# EAGLE board MAPLE-CUN-V016-routed (EAGLE 7.3.0)
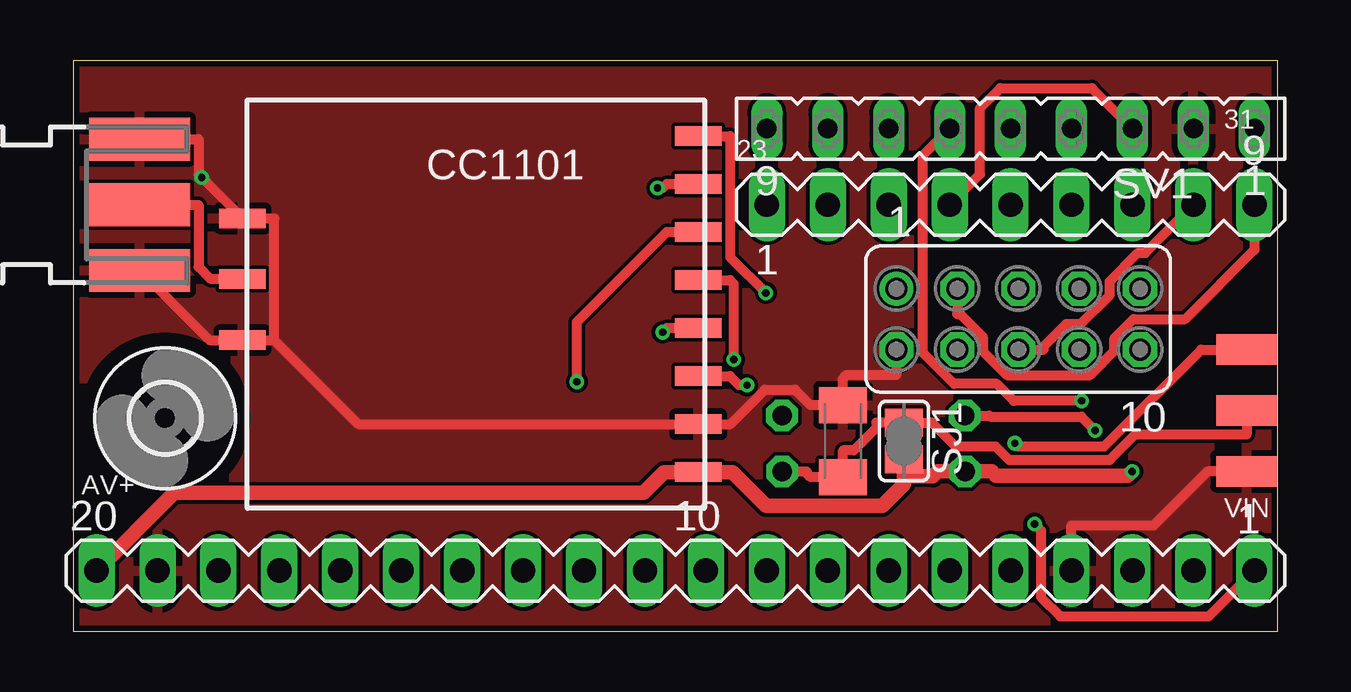
[diagram p0: board, top side]
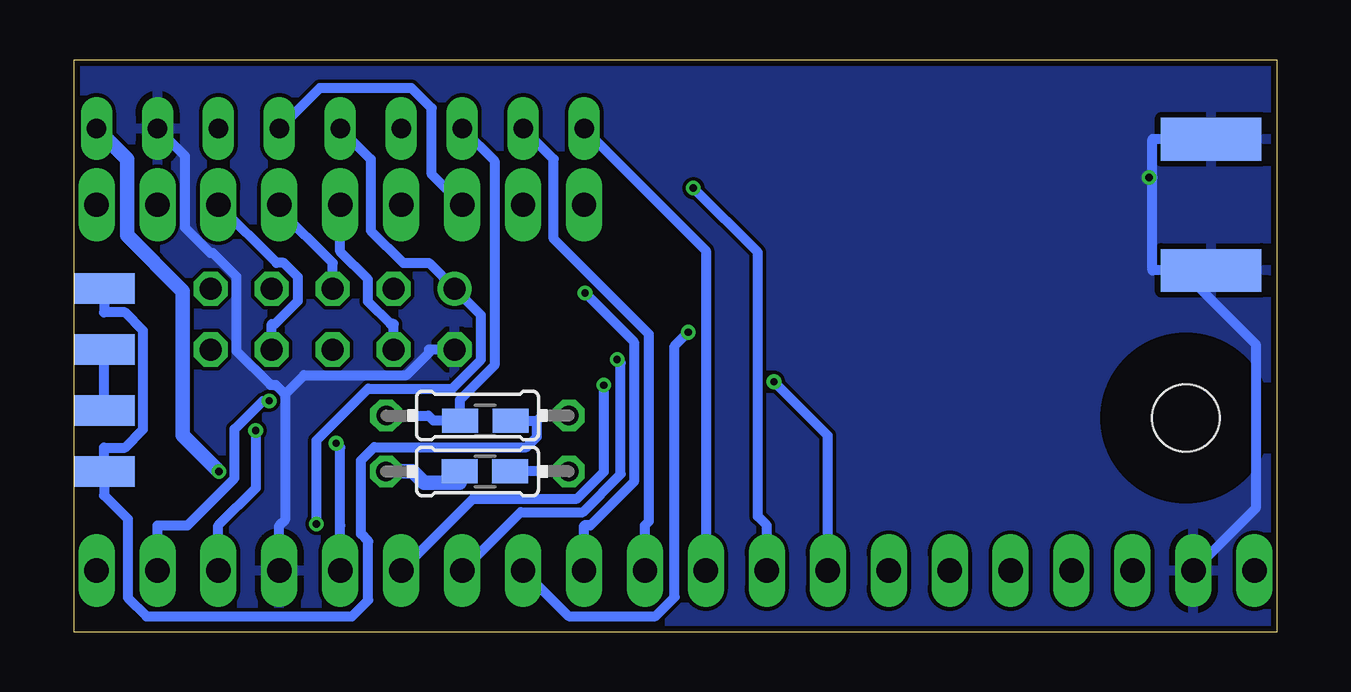
[diagram p1: board, bottom side, seen from below]

Size 50.16 x 23.81 mm. Coordinates in mm from the lower left corner, seen from the top.
Outline: 0,0 0,23.81 50.16,23.81 50.16,0 0,0
Copper layers (1*16): Top 0.035mm / dielectric 1.5mm / Bottom 0.035mm
Design rules "Fusion_eagle_rule_v1.1": minimum track width 6mil, minimum drill 12mil, track to track 6mil, track to pad 6mil, pad to pad 6mil, via to via 6mil, smd to smd 0mil, copper to edge 10mil, drill to drill 10mil, minimum pad ring 10mil, minimum via ring 6mil, stop-mask expansion 2mil, vias tented up to drill 100mil, thermal gap 10mil
Net classes: 0 default: width 0.406 mm; 1 PWR: width 0.61 mm

## Footprints (pad centres in the part's own frame; a part is rotated, then mirrored left to right if it is on the bottom)
C1206K = smd 1.5 x 2: 1 -1.5,0; 2 1.5,0
CC1101_MODULE1_SMD = smd 1.93 x 0.813: ANT 19,5.96; CSN 0,0; GDO0 0,2; GDO2 0,4; GND@0 0,12; GND@1 19,8.5; GND@2 19,3.42; MISO 0,6; MOSI 0,10; SCLK 0,8; VCC 0,14
SMD1,27-2,54 = smd 1.27 x 2.54: 1 0,0
2,8 = hole 2.8: 0,0
0204/7 = drill 0.813 octagon: 1 -3.81,0; 2 3.81,0
R0805W = smd 1.5 x 1: 1 -1.052,0; 2 1.052,0
SJ = smd 1.168 x 1.6: 1 -0.762,0; 2 0.762,0
FE09 = drill 0.813 long: 1 -10.16,0; 2 -7.62,0; 3 -5.08,0; 4 -2.54,0; 5 0,0; 6 2.54,0; 7 5.08,0; 8 7.62,0; 9 10.16,0
MA20-1 = drill 1.016 long: 1 -24.13,0; 2 -21.59,0; 3 -19.05,0; 4 -16.51,0; 5 -13.97,0; 6 -11.43,0; 7 -8.89,0; 8 -6.35,0; 9 -3.81,0; 10 -1.27,0; 11 1.27,0; 12 3.81,0; 13 6.35,0; 14 8.89,0; 15 11.43,0; 16 13.97,0; 17 16.51,0; 18 19.05,0; 19 21.59,0; 20 24.13,0
MA09-1 = drill 1.016 long: 1 -10.16,0; 2 -7.62,0; 3 -5.08,0; 4 -2.54,0; 5 0,0; 6 2.54,0; 7 5.08,0; 8 7.62,0; 9 10.16,0
FE05-2 = drill 0.914: 1 -5.08,1.27 | drill 0.914 octagon: 2 -5.08,-1.27; 3 -2.54,1.27; 4 -2.54,-1.27; 5 0,1.27; 6 0,-1.27; 7 2.54,1.27; 8 2.54,-1.27; 9 5.08,1.27; 10 5.08,-1.27
SMA = smd 4.191 x 1.778: 1 2.115,0; GND@1 2.115,2.733; GND@2 2.115,-2.733 | smd 4.191 x 1.778 bottom: GND@3 2.115,2.733; GND@4 2.115,-2.733

## Placement (x,y rotation side)
C2  4,7uF  [C1206K]  32.07,7.94 90 top
CC1101  CC1101_MODULE1SMD  [CC1101_MODULE1_SMD]  26.04,20.64 180 top
GND  [SMD1,27-2,54]  48.9,6.67 90 top
H1  MOUNT-HOLE2.8  [2,8]  3.81,8.89 0 top
IR+  [SMD1,27-2,54]  48.9,9.21 90 top
IR-IN  [SMD1,27-2,54]  48.9,11.75 90 top
PC+  [SMD1,27-2,54]  48.9,14.29 90 bottom
PC-  [SMD1,27-2,54]  48.9,11.75 90 bottom
PWR+  [SMD1,27-2,54]  48.9,6.67 90 bottom
PWR-  [SMD1,27-2,54]  48.9,9.21 90 bottom
R2  100  [0204/7]  33.34,6.67 180 bottom
R3  100  [R0805W]  33.02,6.67 180 bottom
R5  220  [0204/7]  33.33,9 0 bottom
R7  220  [R0805W]  33.01,8.79 0 bottom
SJ1  [SJ]  34.61,7.94 270 top
SV1  [FE09]  39.05,20.95 180 top
SV4  [MA20-1]  25.08,2.54 180 top
SV5  [MA09-1]  39.05,17.78 0 top
W5100  [FE05-2]  39.37,13.02 0 top
X1  SMA  [SMA]  0.64,17.78 0 top

## Library data of the parts
C2 R2 R3 R5 R7 = rcl
CC1101 = wireless
GND IR+ IR-IN PC+ PC- PWR+ PWR- = wirepad
H1 = holes
SJ1 = jumper
SV1 W5100 = con-lsta; OC_FARNELL: unknown; OC_NEWARK: unknown
SV4 SV5 = con-lstb; OC_FARNELL: unknown; OC_NEWARK: unknown
X1 = sma

## Nets
0-PB11: SV1.6 SV4.2
1-PB10: R5.1 R7.1 SV1.7 SV4.3
3-PB0: IR-IN.1 SV4.5
12: SV4.15
13: SV4.16
14: SV4.17
+5V: SV1.5 SV4.1 W5100.1
CC_IN_0: CC1101.GDO2 SV4.13
CC_OUT_0: CC1101.GDO0 SV4.12
CSN: CC1101.CSN SV4.9
GND: C2.2 CC1101.GND@0 CC1101.GND@1 CC1101.GND@2 GND.1 SV1.2 SV4.4 SV4.19 W5100.2 X1.GND@1 X1.GND@2 X1.GND@3 X1.GND@4
IR+: C2.1 IR+.1 R2.1 R3.1 SJ1.1
MISO2: SV5.7 W5100.8
MOSI: CC1101.MOSI SV4.6
MOSI2: SV5.6 W5100.5
N$1: CC1101.ANT X1.1
N$3: CC1101.MISO SV4.7
N$4: CC1101.SCLK SV4.8
PWR+: PC+.1 PWR+.1 R5.2 R7.2
PWR-: PC-.1 PWR-.1
RX1: SV1.4 SV5.3
S2RX: SV1.8 SV4.10
S2TX: SV1.9 SV4.11
SCK2: SV5.8 W5100.6
TX1: SV1.3 SV5.4
USB-DM: SV5.1
USB-DP: SV5.2
VCC [PWR]: CC1101.VCC R2.2 R3.2 SJ1.2 SV1.1 SV4.20
WIZ_CS: SV5.9 W5100.3
WIZ_RST: SV5.5 W5100.4

## Tracks (layer width: path | path; a pad name or v marks a point on that pad's centre or on a via)
0-PB11  (via drill 0.3 pad 0.61)
  Top 0.406: v42.02,9.61 39.18,9.61 38.47,10.32 36.69,10.32 35.4,11.62 35.4,19.84 SV1.6
  Bottom 0.406: SV4.2 46.67,4.42 45.42,4.42 43.45,6.39 43.45,8.43 42.28,9.61 v42.02,9.61
1-PB10  (via drill 0.3 pad 0.61)
  Top 0.406: v42.58,8.37 42,8.95 38.21,8.95 38.16,9 R5.1
  Bottom 0.406: v42.58,8.37 42.58,5.97 44.13,4.42 SV4.3 | SV1.7 32.63,19.61 32.63,11.09 34.07,9.65 R7.1 35.17,8.79 35.38,9 R5.1
3-PB0  (via drill 0.3 pad 0.61)
  Top 0.406: v39.23,7.85 39.36,7.71 42.96,7.71 46.99,11.75 IR-IN.1
  Bottom 0.406: v39.23,7.85 39.05,7.67 39.05,4.42 SV4.5
+5V  (via drill 0.3 pad 0.61)
  Top 0.406: v40.05,4.48 40.32,4.21 40.32,1.44 41.13,0.63 47.31,0.63 SV4.1
  Bottom 0.406: v40.05,4.48 40.05,7.96 37.89,10.12 34.4,10.12 33.19,11.33 33.19,13.18 W5100.1 35.36,15.35 36.43,15.35 37.78,16.71 37.78,19.68 SV1.5
CC_IN_0  (via drill 0.3 pad 0.61)
  Top 0.406: CC1101.GDO2 24.71,16.64 20.98,12.9 v20.98,10.41
  Bottom 0.406: SV4.13 18.73,8.16 v20.98,10.41
CC_OUT_0  (via drill 0.3 pad 0.61)
  Top 0.406: CC1101.GDO0 24.71,18.64 24.55,18.48 v24.34,18.48
  Bottom 0.406: SV4.12 21.27,4.42 21.65,4.8 21.65,15.79 v24.34,18.48
CSN  (via drill 0.3 pad 0.61)
  Top 0.406: v28.85,14.11 27.36,15.6 27.36,20.64 CC1101.CSN
  Bottom 0.406: v28.85,14.11 26.81,12.07 26.81,6.24 28.63,4.42 28.89,4.42 SV4.9
GND  (via drill 0.3 pad 0.61)
  Top 0.406: W5100.2 34.29,10.68 32.2,10.68 32.07,10.54 C2.2 30.71,9.44 30.07,10.08 28.81,10.08 27.37,8.64 27.36,8.64 CC1101.GND@0 11.86,8.64 8.36,12.14 | 8.36,12.14 CC1101.GND@1 5.66,12.14 X1.GND@2 | 8.36,12.14 8.36,17.22 CC1101.GND@2 v5.34,18.92 5.2,19.05 5.2,20.51 X1.GND@1 | SV4.4 41.59,4.42 45.02,4.42 47.27,6.67 GND.1
  Bottom 0.406: SV4.4 41.59,4.42 41.36,4.66 41.36,9.88 | SV1.2 45.53,19.82 45.53,16.84 44.47,15.78 44.36,15.78 43.38,14.8 43.38,11.7 41.96,10.27 41.74,10.27 41.36,9.88 | 41.36,9.88 40.56,10.68 36.29,10.68 35.36,11.61 35.36,11.75 W5100.2 | 3.98,15.05 0.9,11.97 0.9,5.13 SV4.19 | 3.98,15.05 5.2,15.05 5.2,18.92 | X1.GND@2 3.98,15.05 | 5.2,18.92 5.2,20.51 X1.GND@1 | v5.34,18.92 5.2,18.92
  pour Bottom: 0,0 0,24.13 50.8,24.13 50.8,0
  pour Top: 0,0 0,24.13 50.8,24.13 50.8,0
IR+
  Top 0.406: IR+.1 48.9,8.22 44.25,8.22 43.19,7.15 38.99,7.15 38.43,7.71 36.75,7.71 35.76,8.7 35.19,8.7 SJ1.1 33.45,8.7 33.45,8.48 32.52,7.54 32.07,7.54 C2.1 30.71,6.44 30.54,6.61 30.54,6.67 R2.1
  Bottom 0.406: R2.1 R3.1
MISO2
  Bottom 0.406: W5100.8 41.91,12.81 41.78,12.81 40.82,13.77 40.82,14.77 41.4,15.35 41.71,15.35 SV5.7
MOSI  (via drill 0.3 pad 0.61)
  Top 0.406: CC1101.MOSI 27.36,10.64 27.73,10.26 v28.06,10.26
  Bottom 0.406: SV4.6 33.52,5.54 29.18,5.54 28.06,6.65 v28.06,10.26
MOSI2
  Bottom 0.406: W5100.5 39.37,15.35 41.59,17.58 SV5.6
N$1
  Top 0.406: CC1101.ANT 5.71,14.68 5.2,15.19 5.2,17.78 X1.1
N$3  (via drill 0.3 pad 0.61)
  Top 0.406: CC1101.MISO 27.36,14.64 27.52,14.48 v27.52,11.33
  Bottom 0.406: SV4.7 31.53,4.98 28.95,4.98 27.37,6.55 27.37,11.18 v27.52,11.33
N$4  (via drill 0.3 pad 0.61)
  Top 0.406: v24.55,12.47 24.71,12.64 CC1101.SCLK
  Bottom 0.406: SV4.8 29.53,0.64 25.91,0.64 25.12,1.43 25.12,11.9 v24.55,12.47
PWR+
  Bottom 0.406: 30.86,8.79 30.86,8.11 31.28,7.68 37.64,7.68 38.19,7.13 38.19,4.06 37.88,3.76 37.88,1.31 38.56,0.63 47.13,0.63 47.91,1.41 47.91,4.69 48.9,5.68 PWR+.1 48.9,7.66 48.03,7.66 47.27,8.42 47.27,12.54 48.03,13.3 48.9,13.3 PC+.1 | 30.86,8.79 30.65,9 29.89,9 R5.2 | R7.2 30.86,8.79
PWR-
  Bottom 0.406: PWR-.1 PC-.1
RX1
  Bottom 0.406: SV5.3 35.24,19.05 35.24,21.81 36.08,22.64 39.9,22.64 SV1.4
S2RX
  Bottom 0.406: SV4.10 26.35,4.42 26.19,4.58 26.19,12.39 30.16,16.36 30.16,19.68 SV1.8
S2TX
  Bottom 0.406: SV1.9 23.81,15.88 SV4.11
SCK2
  Top 0.406: W5100.6 40.44,11.75 40.44,11.88 41.37,12.81 41.98,12.81 43.18,14.02 43.18,14.59 44.36,15.78 44.67,15.78 SV5.8
TX1
  Top 0.406: SV5.4 37.78,19.05 37.78,21.81 38.62,22.64 42.44,22.64 SV1.3
VCC  (via drill 0.3 pad 0.61)
  Top 0.61: v44.12,6.67 43.94,6.49 38.44,6.49 38.27,6.67 R2.2 36.03,6.67 35.82,6.46 34.61,6.46 | SV4.20 4.19,5.77 23.75,5.77 24.61,6.64 CC1101.VCC 27.46,6.64 28.86,5.23 33.7,5.23 34.61,6.13 34.61,6.46 | SJ1.2 34.61,6.46
  Bottom 0.61: SV1.1 47.94,19.68 47.94,16.51 45.62,14.19 45.62,8.17 v44.12,6.67 | R2.2 36.03,6.67 35.55,6.19 34.07,6.19 R3.2
WIZ_CS
  Top 0.406: SV5.9 49.21,15.9 46.33,13.02 44.18,13.02 43.38,12.22 43.38,11.69 42.37,10.68 38.91,10.68 37.9,11.69 37.9,12.29 36.96,13.22 36.83,13.22 W5100.3
WIZ_RST
  Bottom 0.406: W5100.4 36.83,12.81 36.96,12.81 37.9,13.75 37.9,14.67 39.05,15.83 SV5.5

## Text on the board
tNames: 31 | 23 | - | STM32-IR-Small | V2.0 www.neuby.de | LED | IR | - | IR-IN | AV+ | + | VIN | GND | +
bValues: 10uF | 220R | 3V3 | www.neuby.de | + | STM-IRMP V2.0 | PC | - | - | PWR | SW | + | IRSen | 5V